# Altium PCB LKS_Motor_0406.PcbDoc
Units mm, origin at the board's own origin, x right, y up, seen from the top; angles counter-clockwise.
Board outline 117 x 10 mm, 2 copper layers (Top Layer, Bottom Layer); 117 components, 77 nets, 346 pads, 79 vias.
Unrouted connection lines stored in the file: 41.
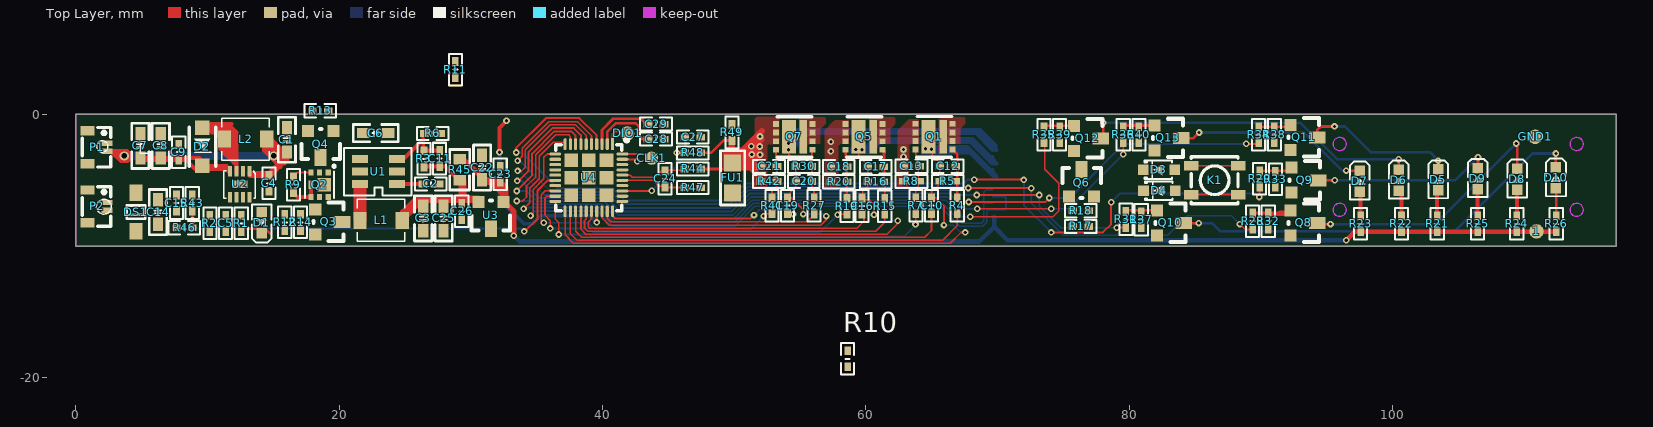
[diagram p0: Top Layer view]
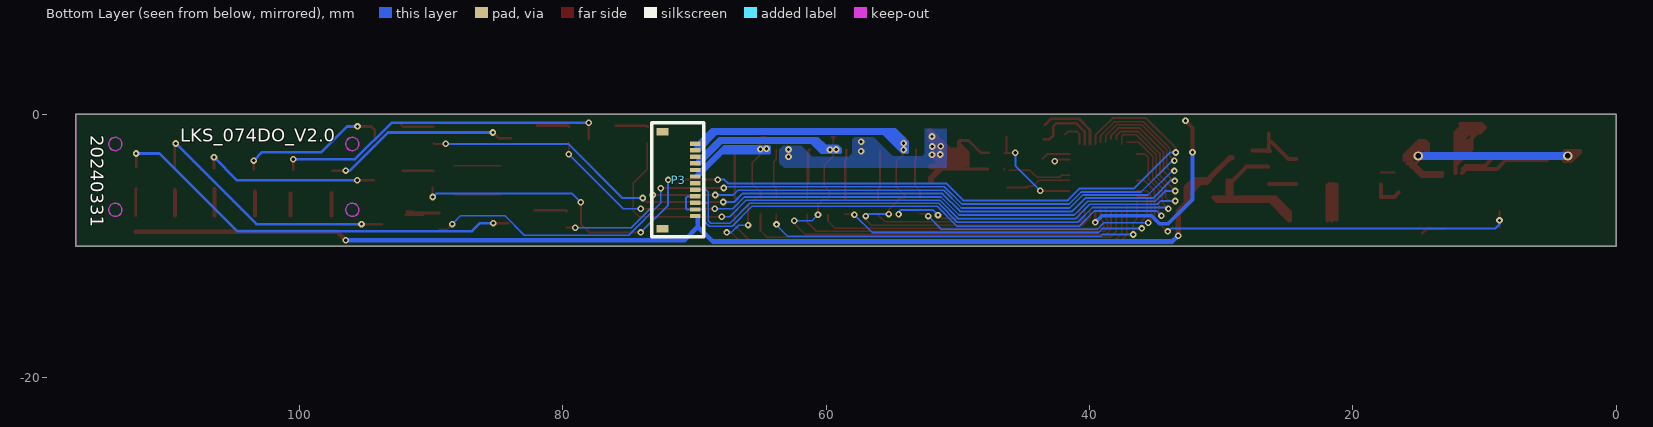
[diagram p1: Bottom Layer view, seen from below]
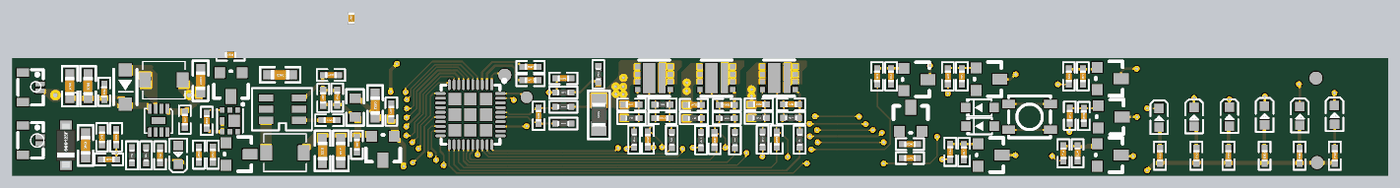
[diagram p2: 3D render of the assembled board from above, using the file's embedded part models]

## Layer stack, top to bottom
Top Solder: solder mask 0.0102, Solder Resist, Dk 3.5
Top Layer: signal copper 0.0356
Dielectric1: core 0.32, FR-4, Dk 4.8
Bottom Layer: signal copper 0.0356
Bottom Solder: solder mask 0.0102, Solder Resist, Dk 3.5

## Board outline
0,-10 0,0 117,0 117,-10

## Design rules (kind name [scope] priority, off if disabled: settings)
Clearance [All] p1: gap=0.1 ignorepadtopadclearanceinfootprint=FALSE except(0: Arc-Hole Track-Hole SMDPad-Hole THPad-Hole Via-Hole Fill-Hole Poly-Hole Region-Hole Text-Hole)
ComponentClearance [All] p1 off: gap=0.254 collisioncheckmode=3 verticalgap=0.254 showdistances=FALSE
FabricationTestpoint [(IsPad And (OnTopLayer Or OnBottomLayer))] p1: side=3 testpointundercomponent=TRUE minsize=1.016 maxsize=2.54 preferedsize=1.524 minholesize=0 maxholesize=1.016 preferedholesize=0.813 testpointgrid=0.025 allowsidetop=TRUE allowsidebottom=TRUE usegrid=TRUE gridtolerance=0
HoleSize [All] p1: absolutevalues=TRUE maxlimit=5.08 minlimit=0.025 maxpercent=80.000 minpercent=20.000
HoleToHoleClearance [All] p1: gap=0.127 allowstackedmicrovias=TRUE
MinimumSolderMaskSliver [All] p1 off: minsoldermaskwidth=0.127
PlaneClearance [All] p1: clearance=0.178
PlaneConnect [All] p1: planeconnectstyle=Direct reliefexpansion=0.508 reliefentries=4 reliefconductorwidth=0.254 reliefairgap=0.254
PolygonConnect [All] p1: connectstyle=Direct reliefconductorwidth=0.254 reliefentries=4 polygonreliefangle="90 Angle" airgapwidth=0.254
RoutingVias [All] p1: holewidth=0.457 width=0.762 viastyle="Through Hole" minholewidth=0.2 minwidth=0.5 maxholewidth=1 maxwidth=2
SilkToSilkClearance [All] p1 off: silktosilkclearance=0
SilkToSolderMaskClearance SilkscreenOverComponentPads [IsPad] p1 off: minsilkscreentomaskgap=0.127 clearancetoexposedcopper=TRUE
SolderMaskExpansion [All] p1: expansion=0.102 istentingtop=FALSE
Width [All] p1: maxlimit=2.54 minlimit=0.127 preferedwidth=0.203
21 further rules are at their usual default settings.

## Classes and differential pairs
component class LKS_074DO_0406: 1 C1 C2 C4 C5 C6 C8 C11 C12 C13 C14 C15 C16 C17 C18 C19 C20 C21 C24 C25 C26 C27 C28 C29 CLK1 D1 D2 D3 D4 D7 D9 DIO1 DS1 FU1 GND1 K1 L1 L2 P1 P2 P3 Q1 Q2 Q3 Q7 Q8 Q10 Q11 Q12 R1 R3 R4 R5 R7 R13 R14 R15 R16 R20 R24 R26 R28 R30 R39 R40 R41 R42 R43 R46 R47 R48 R49 U1 U2 U3 U4

## Components (designator, comment, footprint, x,y, rotation, side; value= is the part's Value field where it differs from the comment)
1 "test" piot#1 110.947,-8.89 r0 top
C1 "22uF/25V" "C 0603_M" 16.027,-1.93 r270 top
C2 "1uF/16V" "C 0402_M" 26.975,-5.283 r180 top
C3 "10uF/16V" "C 0603_M" 26.391,-7.899 r90 top
C4 "1uF/25V" "C 0402_M" 14.681,-5.232 r270 top
C5 "103" "R 0402_M" 11.379,-8.28 r90 top
C6 "10uF/16V" "C 0603_M" 22.784,-1.422 r180 top
C7 "22uF/16V" "C 0603_M" 4.902,-2.388 r270 top
C8 "22uF/16V" "C 0603_M" 6.452,-2.388 r270 top
C9 "4.7uF/25V" "C 0402_M" 7.823,-2.87 r270 top
C10 "2.2uF/25V" "C 0402_M" 64.999,-6.934 r270 top
C11 "10pF/16V" "C 0402_M" 27.635,-3.353 r270 top
C12 "1nF" "C 0402_M" 66.221,-3.943 r0 top
C13 "1nF" "C 0402_M" 63.475,-3.943 r0 top
C14 "22uF/16V" "C 0603_M" 6.248,-7.417 r90 top
C15 "1uF/25V" "C 0402_M" 7.645,-6.731 r90 top
C16 "2.2uF/25V" "C 0402_M" 59.715,-6.96 r270 top
C17 "1nF" "C 0402_M" 60.755,-3.978 r0 top
C18 "1nF" "C 0402_M" 57.961,-3.978 r0 top
C19 "2.2uF/25V" "C 0402_M" 54.051,-6.934 r270 top
C20 "1nF" "C 0402_M" 55.294,-5.096 r0 top
C21 "1nF" "C 0402_M" 52.653,-3.953 r0 top
C22 "10uF/10V" "C 0603_M" 30.861,-4.039 r270 top
C23 "100nF" "C 0402_M" 32.233,-4.547 r90 top
C24 "NC" "C 0402_M" 44.755,-4.902 r90 top
C25 "10uF/10V" "C 0603_M" 27.94,-7.899 r90 top
C26 "100nF/10V" "C 0402_M" 29.312,-7.366 r270 top
C27 "1nF/50V" "C 0402_M" 46.863,-1.727 r180 top
C28 "100nF/10V" "C 0402_M" 44.069,-1.88 r0 top
C29 "1uF/10V" "C 0402_M" 44.069,-0.737 r180 top
CLK1 "test" piot#2 43.739,-3.327 r0 top
D1 "LED_R" 0603-LED 14.046,-8.306 r90 top
D2 "SS34" SOD123FL 9.627,-2.235 r270 top
D3 "4148" SOD-323 82.271,-4.216 r0 top
D4 "4148" SOD-323 82.296,-5.791 r0 top
D5 "LED_R" 0603-LED 103.556,-4.902 r270 top
D6 "LED_R" 0603-LED 100.559,-4.928 r270 top
D7 "LED_R" 0603-LED 97.587,-5.004 r270 top
D8 "LED_R" 0603-LED 109.55,-4.851 r270 top
D9 "LED_R" 0603-LED 106.553,-4.801 r270 top
D10 "LED_R" 0603-LED 112.497,-4.75 r270 top
DIO1 "test" piot#1 41.885,-1.448 r0 top
DS1 "SMF12CA-MS" SOD-123F 4.572,-7.417 r90 top
FU1 "0.05R" "R 0805_M" 49.886,-4.826 r90 top
GND1 "test" piot#1 110.846,-1.702 r0 top
K1 "K1" SMD3.3X3.3X2 86.5,-5 r0 top
L1 "6.8uH" "SMD3.5X3 .2- duplicate" 23.19,-8.052 r0 top
L2 "4.7uH" "SMD3.5X3 .2- duplicate" 12.903,-1.88 r0 top
P1 "Header 2" CONN_SMD_2P_0.6 1.499,-2.515 r270 top
P2 "Header 2" CONN_SMD_2P_0.6 1.499,-7.01 r270 top
P3 "Header 12" SMD-12 69.952,-7.722 r90 bottom
Q1 "CJBM3020" DFN-3X3_8 66.577,-2.672 r90 top
Q2 "CJMP2011" DFN-6-2X2 18.263,-5.08 r180 top
Q3 "J3Y" SOT-23 18.186,-7.214 r270 top
Q4 "J3Y" SOT-23 19.558,-1.245 r180 top
Q5 "CJBM3020" DFN-3X3_8 61.263,-2.681 r90 top
Q6 "J3Y" SOT-23 75.438,-6.223 r0 top
Q7 "CJBM3020" DFN-3X3_8 55.955,-2.681 r90 top
Q8 "J3Y" SOT-23 92.253,-7.29 r270 top
Q9 "J3Y" SOT-23 92.329,-4.039 r270 top
Q10 "J3Y" SOT-23 82.118,-7.29 r270 top
Q11 "J3Y" SOT-23 92.253,-0.787 r270 top
Q12 "J3Y" SOT-23 75.819,-0.864 r270 top
Q13 "J3Y" SOT-23 81.94,-0.838 r270 top
R1 "4.7K" "C 0402_M" 12.573,-8.28 r270 top
R2 "510" "R 0402_M" 10.185,-8.28 r270 top
R3 "2.4M" "C 0402_M" 26.441,-3.378 r90 top
R4 "10R" "R 0402_M" 66.953,-6.94 r270 top
R5 "10K" "R 0402_M" 66.221,-5.086 r180 top
R6 "330K" "C 0402_M" 27.102,-1.448 r0 top
R7 "10R" "R 0402_M" 63.805,-6.934 r270 top
R8 "10K" "R 0402_M" 63.475,-5.086 r180 top
R9 "12K" "C 0402_M" 16.535,-5.334 r270 top
R10 "47K" "C 0402_M" 58.623,-18.567 r90 top
R11 "10K" "C 0402_M" 28.829,3.404 r90 top
R12 "2K" "C 0402_M" 15.875,-8.204 r270 top
R13 "10K" "C 0402_M" 18.567,0.279 r0 top
R14 "10K" "C 0402_M" 17.069,-8.204 r90 top
R15 "10R" "R 0402_M" 61.443,-6.975 r270 top
R16 "10K" "R 0402_M" 60.755,-5.121 r180 top
R17 "20K" "C 0402_M" 76.327,-8.509 r180 top
R18 "10K" "C 0402_M" 76.327,-7.315 r180 top
R19 "10R" "R 0402_M" 58.571,-6.975 r270 top
R20 "10K" "R 0402_M" 57.961,-5.121 r180 top
R21 "1K" "C 0402_M" 103.403,-8.306 r270 top
R22 "1K" "C 0402_M" 100.686,-8.306 r270 top
R23 "1K" "C 0402_M" 97.587,-8.306 r270 top
R24 "1K" "C 0402_M" 109.449,-8.306 r270 top
R25 "1K" "C 0402_M" 106.477,-8.306 r270 top
R26 "1K" "C 0402_M" 112.446,-8.306 r270 top
R27 "10R" "R 0402_M" 56.082,-6.95 r270 top
R28 "10K" "C 0402_M" 89.383,-8.103 r270 top
R29 "10K" "C 0402_M" 89.916,-4.902 r270 top
R30 "10K" "R 0402_M" 55.294,-3.953 r180 top
R31 "10K" "C 0402_M" 79.756,-7.976 r270 top
R32 "100K" "C 0402_M" 90.576,-8.103 r270 top
R33 "100K" "C 0402_M" 91.11,-4.928 r270 top
R34 "10K" "C 0402_M" 89.84,-1.549 r270 top
R35 "10K" "C 0402_M" 73.533,-1.549 r270 top
R36 "10K" "C 0402_M" 79.553,-1.549 r270 top
R37 "100K" "C 0402_M" 80.924,-8.001 r270 top
R38 "100K" "C 0402_M" 91.034,-1.549 r270 top
R39 "100K" "C 0402_M" 74.727,-1.549 r270 top
R40 "100K" "C 0402_M" 80.747,-1.549 r270 top
R41 "10R" "R 0402_M" 52.883,-6.934 r270 top
R42 "10K" "R 0402_M" 52.653,-5.096 r180 top
R43 "2M" "C 0402_M" 8.839,-6.731 r270 top
R44 "1K1%" "R 0402_M" 46.863,-4.14 r180 top
R45 "0R/NC" 0603 29.159,-4.216 r90 top
R46 "470K" "C 0402_M" 8.23,-8.611 r180 top
R47 "1K1%" "R 0402_M" 46.863,-5.563 r180 top
R48 "1K" "R 0402_M" 46.863,-2.921 r180 top
R49 "10R" "R 0402_M" 49.835,-1.372 r90 top
U1 "CS5503R" SOT23-6L 23.038,-4.394 r180 top
U2 "CS5090EL" DFN2X2_8_0.5 12.446,-5.309 r180 top
U3 "CJ6376A33MY" SOT-23 32.487,-6.655 r180 top
U4 "LKS32MC074DOF8Q8" QFN40 38.989,-4.801 r270 top

## Footprints (in the part's own frame and the unit in brackets; to place one, negate y for a bottom-side part, rotate by r counter-clockwise, add the part's x,y. Pads: shape width x height; smd on the part's side, far side on the other; paste and mask are expansions set on the pad)
0603 [mm]
  rect 0.8x0.955 smd: 1(-0.795,0) 2(0.795,0)
  silkscreen extent -1.53,-0.75 1.56,0.75
0603-LED [mm]
  rect 0.8x0.8 smd: 1(0.876,-0.073) 2(-0.723,-0.08)
  silkscreen extent -1.41,-0.82 1.47,0.68
"C 0402_M" [mil] "无极性贴片电容"
  rect 26x20 smd: 1(-24,0) 2(24,0)
  silkscreen extent -47,-20 47,20, body extent -20,-10 20,10, height 21
"C 0603_M" [mil] "无极性贴片电容"
  rect 40x30 smd: 1(-36.5,0) 2(36.5,0)
  silkscreen extent -68,-26 68,26, body extent -31,-16 31,16, height 32
CONN_SMD_2P_0.6 [mm]
  rect 0.4x0.8 smd: 1(-0.324,0.871) 2(0.276,0.871)
  rect 0.7x1.05 smd: 3(1.226,-0.604) 4(-1.274,-0.604)
  silkscreen extent -1.52,-1.01 1.48,1.15
DFN2X2_8_0.5 [mm]
  rect 0.3x0.8 smd: 1(-0.75,-1) 2(-0.25,-1) 3(0.25,-1) 4(0.75,-1) 5(0.75,1) 6(0.25,1) 7(-0.25,1) 8(-0.75,1)
  rect 1.2x0.6 smd: 9(0,0)
  silkscreen extent -1.19,-1.02 1.2,1.08
DFN-3X3_8 [mil]
  rect 17x18 smd: 1(0,0) 2(25.59,0) 3(51.18,0) 4(76.77,0) 5(76.77,109.58) 6(51.18,109.58) 7(25.59,109.58) 8(0,109.58)
  rect 100x23 smd: 9(38.33,27.5)
  rect 100x42 smd: 10(38.33,70.83)
  silkscreen extent -23,2 99,106
DFN-6-2X2 [mm]
  rect 0.4x0.45 smd: 1(-0.904,-0.671) 2(-0.254,-0.671) 3(0.396,-0.671) 4(0.396,1.179) 5(-0.254,1.179) 6(-0.904,1.179)
  rect 1x1.02 smd: 7(-0.604,0.254)
  rect 0.4x0.66 smd: 8(0.396,0.254)
  silkscreen extent -1.45,-1.25 0.85,1.25
piot#1 [mm]
  round 1.1 smd: 1(0,0)
piot#2 [mm]
  round 1 smd: 1(0,0)
QFN40 [mm]
  rect 1.05x1.05 smd: 0(-1.32,-1.352) 0(-1.32,1.308) 0(-1.32,-0.022) 0(0.01,-0.022) 0(0.01,1.308) 0(0.01,-1.352) 0(1.34,-0.022) 0(1.34,-1.352) 0(1.34,1.308)
  rect 0.9x0.24 smd: 1(-2.54,1.778)
  oval 0.9x0.24 smd: 2(-2.54,1.378) 3(-2.54,0.978) 4(-2.54,0.578) 5(-2.54,0.178) 6(-2.54,-0.222) 7(-2.54,-0.622) 8(-2.54,-1.022) 9(-2.54,-1.422) 10(-2.54,-1.822) 21(2.56,-1.822) 22(2.56,-1.422) 23(2.56,-1.022) 24(2.56,-0.622) 25(2.56,-0.222) 26(2.56,0.178) 27(2.56,0.578) 28(2.56,0.978) 29(2.56,1.378) 30(2.56,1.778)
  oval 0.24x0.9 smd: 11(-1.79,-2.572) 12(-1.39,-2.572) 13(-0.99,-2.572) 14(-0.59,-2.572) 15(-0.19,-2.572) 16(0.21,-2.572) 17(0.61,-2.572) 18(1.01,-2.572) 19(1.41,-2.572) 20(1.81,-2.572) 31(1.81,2.528) 32(1.41,2.528) 33(1.01,2.528) 34(0.61,2.528) 35(0.21,2.528) 36(-0.19,2.528) 37(-0.59,2.528) 38(-0.99,2.528) 39(-1.39,2.528) 40(-1.79,2.528)
  silkscreen extent -2.98,-2.52 2.51,2.97
"R 0402_M" [mil] "1/16W贴片电阻"
  rect 26x20 smd: 1(-24,0) 2(24,0)
  silkscreen extent -47,-20 47,20, body extent -20,-10 20,10, height 12
"R 0805_M" [mil] "1/8W贴片电阻"
  rect 50x50 smd: 1(-45,0) 2(45,0)
  silkscreen extent -81,-36 81,36, body extent -39,-25 39,25, height 20
SMD3.3X3.3X2 [mm]
  rect 1.1x0.7 smd: 1(-1.775,1.1) 1(1.775,1.1) 2(-1.775,-1.1) 2(1.775,-1.1)
  silkscreen extent -1.78,-1.78 1.78,1.78
"SMD3.5X3 .2- duplicate" [mm]
  rect 1x1.3 smd: 1(-1.6,0) 2(1.6,0)
  silkscreen extent -1.8,-1.6 1.8,1.6
SMD-12 [mil]
  rect 22x36 smd: 0(252.38,97.5) 0/2(-37.62,97.5)
  rect 13x32 smd: 1(216.53,0) 2(196.85,0) 3(177.17,0) 4(157.48,0) 5(137.79,0) 6(118.11,0) 7(98.42,0) 8(78.74,0) 9(59.05,0) 10(39.37,0) 11(19.69,0) 12(0,0)
  silkscreen extent -62,-25 279,130
SOD123FL [mm]
  rect 1.1x1.1 smd: 1(-1.228,-0.006) 2(1.673,-0.006)
  silkscreen extent -1.28,-1.01 1.72,0.99
SOD-123F [mm]
  rect 1.25x1 smd: 1(1.475,0) 2(-1.475,0)
  silkscreen extent -0.5,-0.7 0.5,0.7, body extent -1.9,-0.85 1.85,0.85, height 1.2
SOD-323 [mm]
  rect 0.8x0.8 smd: 1(1.2,0) 2(-1.2,0)
  silkscreen extent -1.1,-0.7 1,0.7
SOT23-6L [mm]
  rect 1.2x0.6 smd: 1(-1.349,0.899) 2(-1.349,-0.051) 3(-1.349,-1.001) 4(1.451,-1.001) 5(1.451,-0.051) 6(1.451,0.899)
  silkscreen extent -2.45,-1.85 2.65,1.75
SOT-23 [mil]
  rect 36x36 smd: 1(0,0) 2(75,0)
  rect 36x50 smd: 3(38,80)
  silkscreen extent -20,-5 95,85

## Part data
C1 C3 C5 C6 C7 C8 C9 C10 C11 C12 C13 C14 C15 C16 C17 C18 C19 C20 C21 C22 C24 C25 C26: library part CAP, "Capacitor"
C2 C4 C23: library part CAP
C27 C28 C29: library part C, "Capacitor"
D1 D5 D6 D7 D8 D9 D10: library part LED
D2 D3 D4: library part Diode, "Default Diode", PackageDocument=Sep-1996, Code_JEDEC=DO-214-AB, LatestRevisionDate=17-Jul-2002, LatestRevisionNote="Re-released for DXP Platform.", PackageReference=SMC, Published=8-Jun-2000, Publisher="Altium Limited"
DS1: library part DIODE-3, "12V/19.9V"
FU1 R4 R5 R7 R8 R15 R16 R19 R20 R27 R30 R41 R42 R44 R47 R48 R49: library part RAS
L1 L2: library part Inductor, "Inductor", Code_IEC=1005, Code_JEITA=0402, LatestRevisionDate=17-Jul-2002, LatestRevisionNote="Re-released for DXP Platform.", PackageReference=0402-A, Published=8-Jun-2000, Publisher="Altium Limited"
P1 P2: "Header, 2-Pin", LatestRevisionDate=17-Jul-2002, LatestRevisionNote="Re-released for DXP Platform.", Publisher="Altium Limited"
P3: "Header, 12-Pin", LatestRevisionDate=17-Jul-2002, LatestRevisionNote="Re-released for DXP Platform.", Publisher="Altium Limited"
Q3 Q4 Q6 Q8 Q9 Q10 Q11 Q12 Q13: library part NPN, "NPN Transistor"
R1 R2 R3 R6 R9 R10 R11 R12 R13 R14 R17 R18 R21 R22 R23 R24 R25 R26 R28 R29 R31 R32 R33 R34 R35 R36 R37 R38 R39 R40 R43 R45 R46: library part RES2_S
U3: library part 78L15
U4: library part LKS32MC074DF8Q8, "芯片"
Q1 Q5 Q7: PCB DECAL=DFN-3X3_8

## Via types
v1: diameter 0.5, hole 0.25, Top Layer to Bottom Layer, 77 vias
v2: diameter 0.7, hole 0.4, Top Layer to Bottom Layer, 2 vias

## Nets (pads, with @x,y where several pads share a name; then routed paths per layer and width w, separated by ;. In a path a pad name is that pad's centre, name@x,y a point inside that pad or via, vN(x,y) a via of type N, cw(c..) or ccw(c..) an arc to the next point about the centre after c; other vN are vias at no path point)
1ST: R31.2 U4.6 | length 57.9
  Top Layer w0.127: v1(33.553,-4.293) 33.858,-4.293 34.138,-4.013 34.138,-2.692 36.043,-0.787 37.954,-0.787 38.767,-1.6 U4.6@38.767,-2.108 ; v1(68.428,-6.121) v1(73.177,-6.121) ; v1@79.096,-8.585 R31.2
  Bottom Layer w0.127: v1(33.553,-4.293) 33.731,-4.293 35.56,-6.121 40.513,-6.121 41.504,-7.112 49.733,-7.112 51.079,-5.766 66.7,-5.766 67.056,-6.121 v1(68.428,-6.121) ; v1(73.177,-6.121) 73.177,-6.985 74.803,-8.611 v1(79.07,-8.611)
2ND: R28.2 U4.5 | length 69.1
  Top Layer w0.127: v1(33.553,-3.531) 33.909,-3.175 33.909,-2.565 35.916,-0.559 38.1,-0.559 39.167,-1.626 U4.5@39.167,-2.108 ; v1(67.793,-5.588) 72.542,-5.588 v1(72.568,-5.613) ; v1(88.417,-8.331) 88.824,-8.738 89.357,-8.738 R28.2
  Bottom Layer w0.127: v1(33.553,-3.531) 33.731,-3.531 36.093,-5.893 40.64,-5.893 41.554,-6.807 49.708,-6.807 51.029,-5.486 67.691,-5.486 v1(67.793,-5.588) ; v1(72.568,-5.613) 72.568,-6.731 75.006,-9.169 82.931,-9.169 84.404,-7.696 87.782,-7.696 v1(88.417,-8.331)
3.3V: 1.1 C22.2 C23.1 P3.12 R21.2 R22.2 R23.2 R24.2 R25.2 R26.2 R45.2 U3.2 | length 93.7
  Top Layer w0.3: 32.385,-6.477 32.487,-6.579
  Top Layer w0.35: v1(96.495,-9.55) 97.13,-8.915 R23.2 R21.2 R26.2
  Top Layer w0.4: R45.2@29.21,-3.294 29.342,-3.294 C22.2@30.886,-4.839 ; 31.598,-5.156 31.598,-5.182 32.385,-5.969 ; 32.385,-6.477 32.385,-5.969 ; 32.487,-6.655 32.664,-6.477 32.664,-5.563 32.067,-4.966 30.886,-4.966 31.077,-5.156 31.953,-5.156 32.385,-5.588 32.385,-5.969 ; 32.487,-6.579 33.274,-7.366 v1(33.274,-9.22)
  Bottom Layer w0.35: v1(33.274,-9.22) 33.706,-9.652 68.631,-9.652 69.748,-8.534 ; P3.12@69.748,-7.772 69.748,-8.534 ; v1(96.495,-9.55) 70.764,-9.55 69.748,-8.534
3RD: R29.2 U4.4 | length 73.1
  Top Layer w0.15: v1@33.401,-2.845 v1(33.452,-2.896) 33.452,-2.54 35.712,-0.279 38.252,-0.279 39.567,-1.594 U4.4 ; v1(68.25,-4.953) 71.984,-4.953 v1(72.009,-4.978) v1@72.034,-5.004 ; v1(74.092,-8.966) 78.003,-8.966 78.638,-8.331 v1(78.638,-6.68) ; v1@89.916,-6.248 R29.2
  Bottom Layer w0.15: v1(33.452,-2.896) 33.909,-2.896 36.652,-5.639 40.767,-5.639 41.656,-6.528 49.606,-6.528 50.902,-5.232 67.462,-5.232 67.742,-4.953 v1(68.25,-4.953) ; v1(72.009,-4.978) 72.009,-6.883 v1(74.092,-8.966) ; v1(78.638,-6.68) 79.299,-6.02 89.637,-6.02 v1(89.891,-6.274)
BAT_ADC: R43.2 R46.1 U4.16 | length 37.8
  Top Layer w0.15: R46.1@8.865,-8.585 v1(8.865,-8.052) R43.2@8.865,-7.341 ; v1(34.061,-8.89) 34.112,-8.89 35.052,-7.95 35.052,-5.817 35.858,-5.011 U4.16
  Bottom Layer w0.15: v1(8.865,-8.052) 8.865,-8.357 9.169,-8.661 10.109,-8.661 ; 9.652,-8.661 10.109,-8.661 ; 10.287,-8.661 12.167,-8.661 ; 24.384,-8.661 21.057,-8.661 ; v1(34.061,-8.89) 34.011,-8.89 33.782,-8.661 21.057,-8.661 ; 10.109,-8.661 12.167,-8.661 ; 12.167,-8.661 21.057,-8.661
BLUE: R34.2 U4.7 | length 67.9
  Top Layer w0.15: v1(33.528,-5.055) 33.63,-5.055 34.392,-4.293 34.392,-2.845 36.195,-1.041 37.834,-1.041 38.367,-1.575 U4.7@38.367,-1.854 ; v1(67.818,-6.655) 73.635,-6.655 v1(73.939,-6.35) ; v1(88.9,-2.235) 89.764,-2.235 R34.2
  Bottom Layer w0.15: v1(33.528,-5.055) 33.604,-4.978 33.782,-4.978 35.166,-6.363 40.323,-6.363 41.326,-7.366 49.835,-7.366 51.181,-6.02 66.37,-6.02 67.005,-6.655 v1(67.818,-6.655) ; v1(73.939,-6.35) 75.489,-6.35 79.604,-2.235 v1(88.9,-2.235)
CH_STAT: C5.2 R1.1 U2.8 U4.39 | length 1.2
  Top Layer w0.15: U4.39 42.494,-3.411 v1(42.647,-3.563)
DCDC_5V: C3.2 C11.2 C25.2 C26.1 L1.2 R3.1 R45.1 U3.3 | length 28
  Top Layer w0.3: R3.1 26.467,-3.962 C11.2@27.483,-3.962 ; C11.2 28.067,-3.962 28.397,-4.293 29.235,-5.131 29.235,-6.401 C26.1@29.286,-6.452 ; R45.1@29.286,-5.011 C26.1@29.286,-6.452 ; R45.1@29.54,-5.004 29.54,-6.198 C26.1@29.286,-6.452 ; L1.2 24.79,-7.392 25.857,-6.325 30.099,-6.325 ; L1.2 24.79,-7.722 25.921,-6.591 C3.2@26.314,-6.591 ; L1.2 24.854,-8.052 C3.2@26.314,-6.591 ; C3.2@26.314,-6.591 30.34,-6.591 30.607,-6.325 30.099,-6.325 ; C3.2@26.314,-6.591 26.581,-6.325 ; 26.581,-6.325 27.483,-6.325 ; 26.581,-6.325 27.483,-6.325 ; 27.483,-6.325 30.099,-6.325
GND: C1.1 C2.1 C3.1 C4.2 C5.1 C6.1 C7.1 C8.1 C9.1 C14.1 C15.1 C22.1 C23.2 C25.1 C26.2 C27.1 C28.2 C29.1 DS1.2 FU1.1 GND1.1 P1.1 P2.1 P3.7 Q3.2 Q4.2 Q6.2 Q8.2 Q9.2 Q10.2 Q11.2 Q12.2 Q13.2 R2.2 R6.2 R13.1 R14.1 R18.1 R32.2 R33.2 R37.2 R38.2 R39.2 R40.2 R46.2 R47.1 R49.2 U1.2 U2.2 U2.9 U3.1 U4.0 U4.17
GREEN: R36.2 U4.8 | length 58
  Top Layer w0.127: v1(68.478,-7.163) v1(74.092,-7.163) ; v1(79.553,-3.023) R36.2
  Top Layer w0.15: v1(33.503,-5.817) 33.503,-5.791 34.658,-4.635 34.658,-2.984 36.347,-1.295 37.637,-1.295 37.967,-1.626 U4.8@37.967,-1.854
  Bottom Layer w0.127: 34.364,-5.942 35.027,-6.604 40.132,-6.604 41.173,-7.645 49.911,-7.645 51.283,-6.274 66.218,-6.274 67.107,-7.163 v1(68.478,-7.163) ; v1(74.092,-7.163) 75.413,-7.163 v1(79.553,-3.023)
  Bottom Layer w0.15: v1(33.503,-5.817) 34.239,-5.817 34.364,-5.942
HO1: R27.2 U4.29 | length 16.8
  Top Layer w0.127: U4.29@40.367,-7.112 U4.29 40.367,-7.88 40.64,-8.153 52.248,-8.153 55.538,-8.153 56.082,-7.61 R27.2@56.082,-7.585
HO2: R15.2 U4.25 | length 25.3
  Top Layer w0.127: U4.25@38.767,-7.137 U4.25 38.767,-7.925 38.633,-8.058 38.633,-8.636 38.862,-8.865 60.757,-8.865 61.443,-8.179 R15.2
HO3: R4.2 U4.22 | length 32.5
  Top Layer w0.127: U4.22 37.567,-9.043 38.075,-9.55 65.837,-9.55 66.953,-8.434 R4.2@66.953,-7.849
  Top Layer w0.15: R4.2@66.953,-7.849 R4.2@66.953,-7.626
KEYIN: Q6.3 U4.37
KEYOUT: R12.2 U4.38
LH_OUT_01: P3.8 P3.10 U4.10 | length 47.3
  Top Layer w0.127: v1(34.011,-7.163) 34.468,-6.706 34.468,-5.613 35.204,-4.877 35.204,-3.175 36.271,-2.108 U4.10@37.167,-2.108
  Bottom Layer w0.127: v1(34.011,-7.163) 34.108,-7.065 39.78,-7.065 40.894,-8.179 50.038,-8.179 51.46,-6.756 65.811,-6.756 67.31,-8.255 68.783,-8.255 68.961,-8.077 68.961,-6.756 ; P3.10@69.647,-6.722 69.612,-6.756 68.961,-6.756 ; P3.8@69.647,-5.722 69.132,-5.722 68.961,-5.893 68.961,-6.756
LH_OUT_02: P3.9 P3.11 U4.11 | length 46.7
  Top Layer w0.127: v1(34.544,-7.696) 34.734,-7.506 34.734,-5.702 35.547,-4.889 35.547,-3.264 35.801,-3.011 U4.11
  Bottom Layer w0.127: v1(34.544,-7.696) 34.9,-7.341 39.649,-7.341 40.792,-8.484 50.063,-8.484 51.562,-6.985 65.634,-6.985 67.132,-8.484 68.885,-8.484 69.19,-8.179 69.19,-7.374 69.342,-7.222 P3.11@69.647,-7.222
  Bottom Layer w0.15: P3.11@69.647,-7.222 P3.11 70.579,-7.222 70.637,-7.163 70.637,-6.325 70.534,-6.222 P3.9 P3.9@69.647,-6.222
LO1: R41.2 U4.18 | length 21.4
  Top Layer w0.127: v1(35.535,-8.23) 35.357,-8.052 35.357,-6.121 35.668,-5.811 U4.18 ; v1(52.248,-7.722) 52.426,-7.544 R41.2
  Bottom Layer w0.127: v1(35.535,-8.23) 38.913,-8.23 39.395,-8.712 51.257,-8.712 v1(52.248,-7.722)
LO2: R19.2 U4.19 | length 26.6
  Top Layer w0.127: v1(36.043,-8.661) 36.043,-8.077 35.636,-7.671 35.636,-6.325 35.75,-6.211 U4.19 ; v1(57.861,-7.62) 57.896,-7.585 R19.2
  Bottom Layer w0.127: v1@36.043,-8.738 v1(36.043,-8.661) 39.014,-8.661 39.319,-8.966 56.515,-8.966 v1(57.861,-7.62)
LO3: R7.2 U4.20 | length 30.9
  Top Layer w0.127: U4.20 36.417,-7.944 36.678,-8.204 v1@36.678,-9.068 ; v1(63.779,-8.357) 63.805,-8.331 R7.2
  Bottom Layer w0.127: v1(36.678,-9.119) 39.014,-9.119 39.141,-9.246 62.941,-9.246 63.779,-8.407 v1(63.779,-8.357)
NetC2_2: C2.2 U1.1 | length 2.1
  Top Layer w0.3: U1.1@24.311,-5.293 U1.1 C2.2@26.38,-5.293
NetC7_2: C7.2 C8.2 C9.2 D2.2 U2.4 | length 13.9
  Top Layer w0.3: C7.2@5.243,-3.478 5.245,-3.48 8.407,-3.48 9.07,-4.142 U2.4@11.682,-4.142 ; C7.2@5.258,-3.315 6.833,-3.315 9.383,-3.315 9.976,-3.908 11.448,-3.908 ; 11.168,-3.908 11.403,-4.142 U2.4@11.696,-4.436
NetC11_1: C11.1 R3.2 R6.1 U1.3 | length 5.1
  Top Layer w0.3: U1.3@24.311,-3.393 24.877,-3.393 26.187,-2.083 ; R3.2@26.289,-2.769 R3.2 ; R6.1@26.391,-1.448 26.391,-2.718 R3.2 ; C11.1 26.467,-2.743 R3.2
NetC12_2: C12.2 Q1.1 R4.1 R5.1 | length 3.8
  Top Layer w0.2: Q1.1 66.953,-3.048 R4.1 ; R4.1@66.877,-6.356 R4.1@66.877,-6.331
NetC13_2: C13.2 Q1.8 R7.1 R8.1 | length 3.8
  Top Layer w0.127: Q1.8 63.793,-3.417 63.983,-3.607 63.983,-5.436 63.805,-5.613 R7.1
NetC17_2: C17.2 Q5.1 R15.1 R16.1 | length 6.1
  Top Layer w0.15: R15.1@61.443,-6.416 Q5.1@61.443,-2.86
  Top Layer w0.2: Q5.1 61.365,-2.783 R16.1@61.365,-5.146
NetC18_2: C18.2 Q5.8 R19.1 R20.1 | length 3.8
  Top Layer w0.2: Q5.8 58.48,-3.413 58.571,-3.504 C18.2 R19.1@58.571,-6.416
NetC20_2: C20.2 Q7.1 R27.1 R30.1 | length 3.8
  Top Layer w0.15: Q7.1 55.904,-2.732 55.904,-5.146 55.904,-5.561 56.056,-5.713 R27.1@56.056,-6.442
NetC21_2: C21.2 Q7.8 R41.1 R42.1 | length 3.8
  Top Layer w0.127: R41.1 52.883,-5.815 53.262,-5.436 R42.1@53.262,-5.004
  Top Layer w0.15: Q7.8 53.171,-3.311 53.262,-3.402 53.262,-3.978 R42.1@53.262,-5.004
NetC28_1: C28.1 U4.2 | length 5.2
  Top Layer w0.2: U4.2 40.367,-1.314 41.021,-0.66 42.52,-0.66 42.748,-0.889 42.748,-1.6 43.028,-1.88 C28.1
NetC29_2: C29.2 U4.3 | length 5
  Top Layer w0.2: U4.3 39.967,-1.181 40.818,-0.33 42.926,-0.33 C29.2@43.383,-0.787
NetD1_2: D1.2 R1.2 | length 1.8
  Top Layer w0.2: 13.081,-8.687 13.462,-8.687 14.393,-8.687 14.735,-9.029
NetD2_1: D2.1 L2.1 U2.3 | length 32
  Top Layer w0.254: D2.1@9.976,-1.007 10.736,-1.007 L2.1@11.76,-2.032 ; L2.1@10.921,-1.472 10.977,-1.528 10.977,-2.642 11.584,-3.249 ; L2.1@11.481,-2.032 11.481,-3.146 11.584,-3.249 ; 11.76,-3.425 11.584,-3.249
  Top Layer w0.3: L2.1@10.82,-1.372 10.341,-1.372 D2.1@9.976,-1.007 ; 11.455,-0.991 11.684,-1.219 ; 11.557,-0.737 12.196,-1.376 12.196,-2.057 ; 11.735,-0.991 9.993,-0.991 D2.1@9.976,-1.007 ; 11.836,-0.737 10.247,-0.737 D2.1@9.976,-1.007 ; 11.963,-1.219 10.188,-1.219 D2.1@9.976,-1.007 ; L2.1@11.481,-2.032 11.201,-2.032 10.541,-1.372 11.836,-1.372 ; L2.1@11.481,-2.032 11.227,-2.286 11.227,-2.892 11.889,-3.554 ; L2.1@11.481,-2.032 11.887,-2.032 12.196,-2.341 ; L2.1@11.481,-2.032 L2.1@11.76,-2.311 ; L2.1@11.481,-2.032 12.018,-2.569 12.018,-3.683 ; L2.1@11.481,-2.032 12.196,-2.747 12.196,-4.436 U2.3@12.196,-4.013 ; 11.684,-1.219 11.684,-2.235 L2.1@11.76,-2.311 ; 11.684,-1.219 11.836,-1.372 ; L2.1@11.76,-2.311 11.76,-2.921 11.76,-3.425 11.889,-3.554 ; 11.836,-1.372 11.989,-1.524 ; 11.889,-3.554 12.018,-3.683 ; 11.989,-1.524 11.989,-2.134 12.196,-2.341 ; 11.989,-1.524 12.196,-1.731 12.196,-2.057 ; 12.018,-3.683 12.196,-3.861 U2.3@12.196,-4.013 ; U2.3@12.196,-4.013 12.196,-2.341 ; 12.196,-2.341 12.196,-2.057
NetD3_1: D3.1 D4.1 K1.2 | length 3.5
  Top Layer w0.15: K1.2@84.725,-6.1 K1.2@88.275,-6.1
NetD3_2: D3.2 R11.1
NetD4_2: D4.2 R17.1
NetD5_1: D5.1 R21.1 | length 1.8
  Top Layer w0.3: R21.1 D5.1@103.403,-5.857
NetD5_2: D5.2 Q11.3 | length 11.5
  Top Layer w0.2: Q11.3 94.285,-1.194 94.564,-0.914 v1(95.606,-0.914) ; D5.2 v1@103.476,-3.629
  Bottom Layer w0.2: v1(95.606,-0.914) 96.393,-0.914 98.349,-2.87 102.845,-2.87 v1(103.48,-3.505)
NetD6_1: D6.1 R22.1 | length 1.7
  Top Layer w0.3: R22.1 D6.1@100.686,-6.003
NetD6_2: D6.2 Q12.3 | length 25.6
  Top Layer w0.2: Q12.3@78.029,-1.829 v1(78.029,-0.635) ; D6.2 100.482,-4.201 v1(100.482,-3.404)
  Bottom Layer w0.2: v1(78.029,-0.635) 93.015,-0.635 95.783,-3.404 v1(100.482,-3.404)
NetD7_1: D7.1 R23.1 | length 1.7
  Top Layer w0.3: R23.1 D7.1@97.587,-5.952
NetD7_2: D7.2 Q13.3 | length 14.9
  Top Layer w0.2: Q13.3 84.887,-1.803 v1(85.319,-1.372) ; v1(96.495,-4.267) 97.494,-4.267 D7.2
  Bottom Layer w0.2: v1(85.319,-1.372) 93.294,-1.372 96.19,-4.267 v1(96.495,-4.267)
NetD8_1: D8.1 R24.1 | length 1.9
  Top Layer w0.3: R24.1 D8.1@109.449,-5.756
NetD8_2: D8.2 Q8.3 | length 20
  Top Layer w0.2: Q8.3@93.777,-8.357 v1@95.326,-8.357 ; D8.2 v1@109.471,-2.283
  Bottom Layer w0.2: v1(95.301,-8.331) 103.276,-8.331 v1(109.398,-2.21)
NetD9_1: D9.1 R25.1 | length 2
  Top Layer w0.3: R25.1 D9.1@106.477,-5.68
NetD9_2: D9.2 Q9.3 | length 13.7
  Top Layer w0.2: Q9.3 v1(95.631,-5.004) ; D9.2 106.502,-4.049 v1(106.502,-3.251)
  Bottom Layer w0.2: v1(95.631,-5.004) 104.75,-5.004 v1(106.502,-3.251)
NetD10_1: D10.1 R26.1 | length 2.1
  Top Layer w0.2: D10.1 112.446,-5.647 R26.1
NetD10_2: D10.2 Q10.3 | length 32
  Top Layer w0.2: Q10.3 v1(85.293,-8.255) ; D10.2 112.417,-2.975 v1(112.42,-2.972)
  Bottom Layer w0.2: v1(85.293,-8.255) 86.284,-8.255 86.893,-8.865 104.75,-8.865 110.642,-2.972 v1(112.42,-2.972)
NetK1_1: K1.1 R10.1 | length 3.5
  Top Layer w0.15: K1.1@84.725,-3.9 K1.1@88.275,-3.9
NetL1_1: L1.1 U1.6 | length 10.8
  Top Layer w0.3: L1.1@21.257,-7.998 U1.6@21.257,-5.319 ; U1.6@21.511,-5.293 21.511,-7.972 L1.1 ; L1.1@21.765,-7.947 U1.6@21.765,-5.268 ; L1.1@21.917,-8.074 U1.6@21.917,-5.395
NetQ2_3: Q2.3 Q3.3 Q4.3 R9.1 | length 1
  Top Layer w0.15: 16.851,-4.409 Q2.3
NetQ3_1: Q3.1 R12.1 R14.2
NetQ4_1: Q4.1 R11.2 R13.2
NetQ6_1: Q6.1 R17.2 R18.2
NetQ8_1: Q8.1 R28.1 R32.1 | length 4.4
  Top Layer w0.2: R28.1 R32.1 91.77,-7.493 ; R32.1@90.602,-7.62 91.237,-7.62 ; Q8.1@91.872,-7.391 91.745,-7.391 91.465,-7.391 91.237,-7.62 ; Q8.1@91.923,-7.62 91.237,-7.62
NetQ9_1: Q9.1 R29.1 R33.1 | length 2.3
  Top Layer w0.2: R29.1@89.84,-4.267 Q9.1@92.151,-4.267
NetQ10_1: Q10.1 R31.1 R37.1 | length 2.4
  Top Layer w0.2: R31.1@79.731,-7.366 79.807,-7.29 Q10.1
NetQ11_1: Q11.1 R34.1 R38.1 | length 2.5
  Top Layer w0.2: R34.1 R38.1 92.1,-0.94 Q11.1
NetQ12_1: Q12.1 R35.1 R39.1 | length 2.5
  Top Layer w0.2: R35.1@73.558,-0.94 73.635,-0.864 Q12.1@75.997,-0.864
NetQ13_1: Q13.1 R36.1 R40.1 | length 2.5
  Top Layer w0.2: R36.1@79.527,-0.94 79.629,-0.838 Q13.1
NetR2_1: R2.1 U2.6
OC: C27.2 R48.2 U4.33 | length 8.1
  Top Layer w0.15: U4.33 43.77,-5.811 v1@43.84,-5.74 ; v1(45.644,-2.921) R48.2@46.457,-2.921 ; R48.2@46.304,-2.972 C27.2@46.304,-1.727
  Bottom Layer w0.15: v1(43.739,-5.791) 45.644,-3.886 v1(45.644,-2.921) ; v1@43.84,-5.74 v1@43.866,-5.74
OPA0_IN: C24.1 R47.2 U4.35 | length 5.2
  Top Layer w0.127: U4.35 42.298,-5.011 43.847,-5.011 44.12,-5.283 ; C24.1@44.755,-5.461 44.298,-5.461 ; 44.12,-5.283 44.298,-5.461 ; 44.12,-5.283 44.298,-5.461
  Top Layer w0.15: C24.1@44.755,-5.563 R47.2
OPA0_IP: C24.2 R44.2 U4.36 | length 5
  Top Layer w0.127: U4.36 42.101,-4.611 42.266,-4.775 43.993,-4.775 44.348,-4.42 44.526,-4.242 C24.2@44.831,-4.242
  Top Layer w0.15: C24.2@44.831,-4.242 R44.2@46.101,-4.242 ; R44.2@46.443,-4.204 R44.2@46.507,-4.14
PGND: C13.1 C18.1 C21.1 FU1.2 Q1.5 Q1.6 Q1.7 Q5.5 Q5.6 Q5.7 Q7.5 Q7.6 Q7.7 R8.2 R20.2 R42.2 R44.1 R48.1 R49.1 | length 33.7
  Top Layer w0.2: R48.1@47.676,-2.921 48.26,-2.921 49.098,-2.083
  Top Layer w0.203: R44.1@47.727,-4.14 48.717,-4.14 ; 48.959,-2.222 49.2,-1.981 R49.1@49.886,-1.981 ; 49.149,-4.14 48.717,-4.14 ; FU1.2@49.276,-4.14 49.225,-4.089 49.225,-2.87 49.708,-2.388 ; 49.657,-2.743 49.708,-2.692 49.708,-2.388 ; 49.886,-2.515 49.886,-2.413 ; 49.962,-2.743 49.962,-2.057 R49.1@49.886,-1.981 ; 50.521,-3.048 49.886,-2.413 ; 51.359,-4.14 48.717,-4.14 ; 49.708,-2.388 49.886,-2.21 R49.1@49.886,-1.981 ; 49.886,-2.413 R49.1@49.886,-1.981
  Top Layer w0.45: 50.521,-2.743 50.622,-2.743 ; 51.003,-3.785 51.714,-4.496 ; 51.41,-4.191 51.714,-4.496 ; 51.46,-2.743 51.232,-2.743 ; v1@51.486,-3.2 51.486,-3.556 ; v1(51.943,-2.438) v1(51.333,-3.048) ; v1(51.968,-3.073) 51.486,-3.556 ; R42.2 52.043,-4.824 51.714,-4.496 ; C21.1 49.673,-3.953 FU1.2@49.505,-3.785 ; 52.07,-1.905 51.232,-2.743 ; 52.121,-1.245 50.622,-2.743 ; FU1.2@49.505,-3.785 49.505,-2.972 49.835,-3.302 51.079,-3.302 ; FU1.2@49.505,-3.785 50.597,-3.785 ; FU1.2@49.505,-3.785 49.809,-3.48 50.902,-3.48 ; 50.597,-3.785 51.257,-3.785 ; 50.597,-3.785 50.902,-3.48 ; 50.622,-2.743 49.962,-2.743 49.657,-2.743 49.962,-3.048 v1(51.333,-3.048) ; 50.622,-2.743 50.952,-2.743 51.232,-2.743 ; 50.902,-3.48 51.079,-3.302 ; 50.902,-3.48 51.257,-3.48 ; 51.079,-3.302 51.257,-3.48 ; 51.079,-3.302 v1(51.333,-3.048) ; 51.257,-3.785 51.486,-3.556 ; 51.257,-3.785 51.257,-3.48
  other v1: 62.865,-3.226 57.353,-2.794 62.865,-2.667 51.308,-2.413 57.353,-2.083 51.968,-1.676
RED: R35.2 U4.9 | length 56.9
  Top Layer w0.127: v1(33.503,-6.579) 33.528,-6.604 33.909,-6.604 34.239,-6.274 34.239,-5.436 34.925,-4.75 34.925,-3.073 36.449,-1.549 37.44,-1.549 37.567,-1.677 U4.9 ; v1(67.945,-7.772) 74.219,-7.772 74.651,-7.341 74.651,-5.232 73.584,-4.166 R35.2@73.584,-2.159
  Bottom Layer w0.127: v1(33.503,-6.579) 34.595,-6.579 34.849,-6.833 39.98,-6.833 41.072,-7.925 49.962,-7.925 51.359,-6.528 66.091,-6.528 67.335,-7.772 v1(67.945,-7.772)
SWCLK: CLK1.1 U4.40 | length 2.2
  Top Layer w0.15: U4.40 43.219,-3.011 CLK1.1@43.561,-3.353
SWDIO: DIO1.1 U4.1 | length 2
  Top Layer w0.15: U4.1 40.767,-1.499 40.97,-1.295 41.631,-1.295 DIO1.1@41.859,-1.524
U: C19.1 C20.1 P3.1 P3.2 Q7.10 R30.2 U4.28 | length 71.5
  Top Layer w0.127: U4.28 39.967,-7.861 40.513,-8.407 56.591,-8.407 56.998,-8.001 v1(56.998,-7.722) ; Q7.10 54.155,-3.076 54.685,-3.605 54.685,-3.978 54.685,-5.121 54.685,-5.488 54.356,-5.817 54.051,-6.121 C19.1 54.331,-6.325 55.245,-7.239 v1(55.245,-7.569)
  Bottom Layer w0.127: v1(55.245,-7.569) 56.845,-7.569 v1(56.998,-7.722)
  Bottom Layer w0.3: 53.848,-2.845 55.27,-1.422 55.651,-1.422 ; 54.026,-2.464 54.026,-2.337 55.169,-1.194 65.583,-1.194 ; 55.397,-1.194 54.762,-1.194 53.848,-2.108 53.848,-2.87 54.204,-2.87 55.651,-1.422 ; 65.888,-1.422 65.583,-1.422 ; 65.989,-1.194 65.583,-1.194 ; 67.945,-1.422 68.141,-1.422 ; 67.97,-1.194 67.742,-1.194 ; 68.199,-1.422 67.97,-1.422 ; 68.394,-1.465 P3.2@69.634,-2.705 ; 68.732,-1.6 68.555,-1.422 67.97,-1.422 ; P3.1@69.647,-2.222 69.354,-2.222 68.707,-1.575 ; P3.2@69.854,-2.722 69.854,-2.366 68.682,-1.194 68.326,-1.194 ; P3.2 68.805,-1.575 68.707,-1.575 ; 55.651,-1.422 65.583,-1.422 ; 65.583,-1.422 67.97,-1.422 ; 65.583,-1.194 67.742,-1.194 ; 67.742,-1.194 68.326,-1.194 ; 68.326,-1.194 68.453,-1.321 68.707,-1.575
  other v1: 54.127,-2.692 54.127,-2.184
V: C16.1 C17.1 P3.3 P3.4 Q5.10 R16.2 U4.24 | length 65.1
  Top Layer w0.127: U4.24 38.367,-8.725 38.735,-9.093 61.62,-9.093 62.433,-8.28 v1(62.433,-8.077) ; Q5.10 59.464,-3.178 60.146,-3.859 C17.1 R16.2 60.146,-5.436 59.765,-5.817 59.765,-6.264 C16.1@59.866,-6.366 ; C16.1@59.866,-6.35 C16.1@59.866,-6.366 ; C16.1@59.882,-6.35 C16.1@59.866,-6.366 ; 59.978,-6.477 60.274,-6.477 60.63,-6.833 v1(60.63,-7.62)
  Bottom Layer w0.127: v1(60.63,-7.62) 61.087,-8.077 v1(62.433,-8.077)
  Bottom Layer w0.3: v1@59.258,-2.692 60.173,-2.692 ; 61.214,-2.083 61.138,-2.083 60.35,-2.87 58.953,-2.87 58.953,-2.616 59.131,-2.438 60.071,-2.438 ; 65.583,-2.083 65.38,-2.083 ; 68.682,-2.642 69.262,-3.222 ; 68.834,-2.794 67.894,-1.854 ; P3.3@69.647,-3.222 69.262,-3.222 ; P3.4 69.583,-3.722 67.944,-2.083 67.716,-2.083 65.38,-2.083 ; 60.071,-2.438 60.071,-2.591 60.173,-2.692 ; 60.071,-2.438 60.655,-1.854 65.71,-1.854 67.894,-1.854 ; 60.173,-2.692 60.782,-2.083 65.38,-2.083 ; 67.894,-1.854 68.123,-1.854 69.762,-3.493 69.762,-3.722 69.262,-3.222
  other v1: 59.715,-2.692 59.233,-2.667
VB1: C19.2 U4.30 | length 15.1
  Top Layer w0.15: U4.30@40.767,-7.208 40.767,-7.747 40.919,-7.899 51.257,-7.899 v1(51.511,-7.645) ; v1@54.356,-7.595 v1@54.559,-7.595
  Bottom Layer w0.15: v1(51.511,-7.645) 51.905,-7.252 54.343,-7.252 54.559,-7.468 v1@54.559,-7.595
  other v1: 54.508,-7.595
VB2: C16.2 U4.26 | length 23.5
  Top Layer w0.127: U4.26@39.167,-7.208 U4.26 39.167,-7.925 38.913,-8.179 38.913,-8.509 39.04,-8.636 59.333,-8.636 59.866,-8.103 C16.2@59.866,-7.636
  Top Layer w0.15: 59.866,-8.026 C16.2@59.866,-7.636
VB3: C10.2 U4.23 | length 30.2
  Top Layer w0.127: U4.23 37.967,-8.884 38.405,-9.322 64.491,-9.322 64.999,-8.814 C10.2
VBAT_8V4: C14.2 C15.2 DS1.1 P2.2 Q2.4 Q2.8 R9.2 R10.2 R43.1 U2.5 | length 2.4
  Top Layer w0.3: R9.2 16.851,-6.259 Q2.4 Q2.8
VCC: C6.2 Q1.2 Q1.3 Q1.4 Q1.9 Q2.1 Q2.2 Q2.5 Q2.6 Q2.7 Q5.2 Q5.3 Q5.4 Q5.9 Q7.2 Q7.3 Q7.4 Q7.9 U1.4 U1.5 U4.27 | length 15.9
  Top Layer w0.2: v1@39.567,-8.096 U4.27
  Top Layer w0.3: v1@32.283,-2.87 v1(32.182,-2.87) 32.182,-1.016 v1(32.715,-0.483)
  Bottom Layer w0.3: v1(32.182,-2.87) 32.182,-6.452 32.563,-6.833 ; 32.385,-6.655 32.563,-6.833 ; v1(39.573,-8.204) 39.065,-7.696 35.306,-7.696 34.696,-8.306 34.036,-8.306 32.563,-6.833
VIN: C1.2 C4.1 D1.1 L2.2 P1.2 U2.1 | length 36.2
  Top Layer w0.3: U2.1@13.196,-4.436 14.666,-4.436 15.609,-3.492 ; U2.1@13.221,-4.664 14.781,-4.664 15.781,-3.664 ; 14.503,-2.743 L2.2@14.503,-2.032 ; L2.2@14.503,-2.386 15.863,-3.746 ; L2.2@14.681,-2.032 14.986,-2.032 16.078,-3.124 16.078,-3.48 L2.2@14.783,-2.184 ; 15.55,-4.013 14.28,-2.743 14.28,-2.255 L2.2@14.503,-2.032 ; 15.863,-3.392 L2.2@14.503,-2.032 ; P1.2@2.751,-2.791 3.324,-2.791 ; P1.2@2.751,-2.791 3.883,-2.791 4.064,-2.972 4.064,-3.404 3.912,-3.556 3.429,-3.556 2.751,-2.878 P1.2@2.751,-2.791 ; P1.2@2.751,-2.791 2.867,-2.791 3.226,-3.15 3.324,-3.051 3.324,-2.791 ; P1.2@2.751,-2.791 3.324,-2.791 ; 3.324,-2.791 v2(3.683,-3.15) 3.324,-2.791
  Bottom Layer w0.3: 14.224,-3.15 v2(15.037,-3.15)
  Bottom Layer w0.6: v2(3.683,-3.15) 14.503,-3.15 ; 14.224,-3.15 v2(15.037,-3.15)
VS3: C10.1 C12.1 P3.5 P3.6 Q1.10 R5.2 U4.21 | length 60.3
  Top Layer w0.127: U4.21@37.167,-6.954 U4.21 37.167,-9.151 37.795,-9.779 66.421,-9.779 67.234,-8.966 v1(67.564,-8.966) ; Q1.10 65.049,-1.97 65.049,-3.099 65.611,-3.661 C12.1 R5.2 65.611,-5.28 64.999,-5.893 C10.1 ; C10.1@65.227,-6.325 65.303,-6.325 65.938,-6.96 v1(65.938,-8.407)
  Bottom Layer w0.127: v1(65.938,-8.407) 66.65,-8.407 67.208,-8.966 v1(67.564,-8.966)
  Bottom Layer w0.3: v1@64.541,-2.667 v1(64.541,-2.616) ; 64.77,-2.896 64.364,-2.896 ; v1@64.999,-2.718 v1(64.999,-2.642) 67.666,-2.642 ; 68.026,-3.002 67.92,-2.896 67.539,-2.896 64.364,-2.896 ; P3.5@69.647,-4.222 69.246,-4.222 ; P3.6@69.748,-4.722 P3.6@69.746,-4.722 ; P3.6 69.952,-4.699 69.746,-4.493 ; 64.364,-2.896 64.364,-2.489 67.513,-2.489 ; 67.513,-2.489 67.742,-2.489 69.746,-4.493 ; 67.513,-2.489 67.666,-2.642 ; 67.666,-2.642 68.275,-3.251 69.246,-4.222 ; 69.246,-4.222 P3.6@69.746,-4.722 ; P3.6@69.746,-4.722 69.746,-4.493
pads on no net: P1.3 P1.4 P2.3 P2.4 P3.0 P3.0/2 U2.7 U4.12 U4.13 U4.14 U4.15 U4.31 U4.32 U4.34

## Polygon pours and split planes (outlines as drawn)
VCC on Top Layer "Top Layer-No Net" (solid, pour order 1011): 66.316,-2.235 67.172,-2.235 67.172,-1.118 67.417,-0.864 67.564,-0.711 67.564,-0.457 67.564,-0.279 67.491,-0.203 67.27,-0.203 65.729,-0.203 65.557,-0.381 65.557,-0.762 65.557,-2.921 65.606,-2.972 65.973,-2.972 66.169,-2.972 66.169,-2.667 66.169,-2.388 66.316,-2.235
VCC on Top Layer "Top Layer-No Net" (solid, pour order 1009): 61.007,-2.235 61.864,-2.235 61.864,-1.118 62.109,-0.864 62.255,-0.711 62.255,-0.457 62.255,-0.279 62.182,-0.203 61.962,-0.203 60.42,-0.203 60.249,-0.381 60.249,-0.762 60.249,-2.921 60.298,-2.972 60.665,-2.972 60.861,-2.972 60.861,-2.667 60.861,-2.388 61.007,-2.235
VCC on Top Layer "Top Layer-No Net" (solid, pour order 1007): 55.699,-2.235 56.555,-2.235 56.555,-1.118 56.8,-0.864 56.947,-0.711 56.947,-0.457 56.947,-0.279 56.873,-0.203 56.653,-0.203 55.111,-0.203 54.94,-0.381 54.94,-0.762 54.94,-2.921 54.989,-2.972 55.356,-2.972 55.552,-2.972 55.552,-2.667 55.552,-2.388 55.699,-2.235
PGND on Top Layer "Top Layer-No Net" (solid, remove dead copper, pour order 1010): 62.433,-3.2 62.433,-5.436 62.484,-5.486 63.144,-5.486 63.271,-5.486 63.322,-5.436 63.322,-5.385 63.322,-2.337 63.424,-2.235 63.652,-2.235 64.033,-2.235 64.033,-1.854 64.033,-0.406 63.983,-0.356 63.5,-0.356 63.271,-0.356 62.967,-0.66 62.433,-1.194 62.433,-2.743
PGND on Top Layer "Top Layer-No Net" (solid, remove dead copper, pour order 1008): 56.871,-3.277 56.871,-5.69 57.81,-5.69 57.887,-5.613 57.912,-5.588 57.912,-3.708 57.912,-2.388 58.014,-2.286 58.064,-2.235 58.217,-2.235 58.725,-2.235 58.725,-1.778 58.725,-0.483 58.699,-0.457 58.674,-0.432 58.014,-0.432 57.633,-0.432 57.455,-0.61 56.871,-1.194 56.871,-1.372
PGND on Top Layer "Top Layer-No Net" (solid, remove dead copper, pour order 1006): 51.537,-2.819 51.537,-5.486 51.562,-5.512 51.587,-5.537 51.613,-5.537 52.451,-5.537 52.502,-5.486 52.502,-5.41 52.502,-2.388 52.578,-2.311 52.629,-2.261 52.857,-2.261 53.416,-2.261 53.416,-2.108 53.416,-0.254 53.315,-0.152 53.188,-0.152 51.74,-0.152 51.562,-0.33
PGND on Bottom Layer "Top Layer-No Net" (solid, remove dead copper, pour order 1012): 50.851,-1.092 50.851,-3.962 50.952,-4.064 51.41,-4.064 63.195,-4.064 63.525,-3.734 63.576,-3.683 63.576,-2.845 63.576,-2.667 63.271,-2.362 62.205,-2.362 61.9,-2.362 61.671,-2.591 61.062,-3.2 59.715,-3.2 58.268,-3.2 58.064,-2.997 58.014,-2.946 58.014,-2.438 58.014,-1.93 57.836,-1.753 57.328,-1.753 56.388,-1.753 56.134,-2.007 54.966,-3.175 54.559,-3.175 52.73,-3.175 52.68,-3.124 52.527,-2.972 52.527,-2.819 52.527,-1.092

## Keep-outs
Keep-Out Layer:
  circle w0.1: c96,-7.25 r0.5
  circle w0.1: c96,-2.25 r0.5
  circle w0.1: c114,-7.25 r0.5
  circle w0.1: c114,-2.25 r0.5
  lines w0.1: 0,-10 117,-10 117,0 0,0 0,-10

## Silkscreen, mask and mechanical layers (free items; w line width, h text height)
Top Overlay:
  circle w0.1: c2.134,-7.01 r0.564
  circle w0.1: c2.007,-2.438 r0.432
  lines w0.1: 4.877,-1.956 4.877,-2.946 5.613,-2.946
Bottom Overlay:
  drawing of 23 lines, arcs and shapes, not listed
  text "20240331" at 115.875,-1.6 h1 r90
  text "LKS_074DO_V2.0" at 109.068,-2.073 h1